# Altium PCB GpioPowerAddon.PcbDoc
Units mil, origin at the board's own origin, x right, y up, seen from the top; angles counter-clockwise.
Board outline 3300 x 1000 mil, 2 copper layers (Top Layer, Bottom Layer); 37 components, 30 nets, 156 pads, 7 vias.
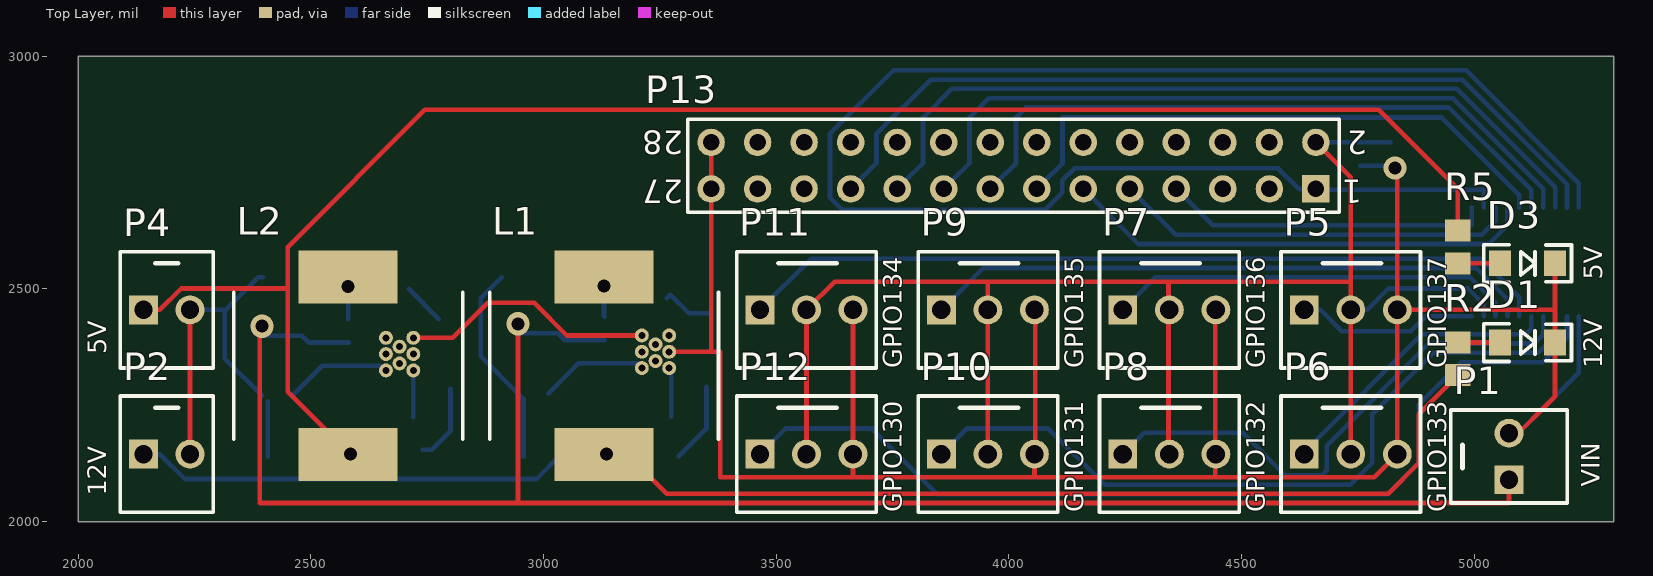
[diagram p0: Top Layer view]
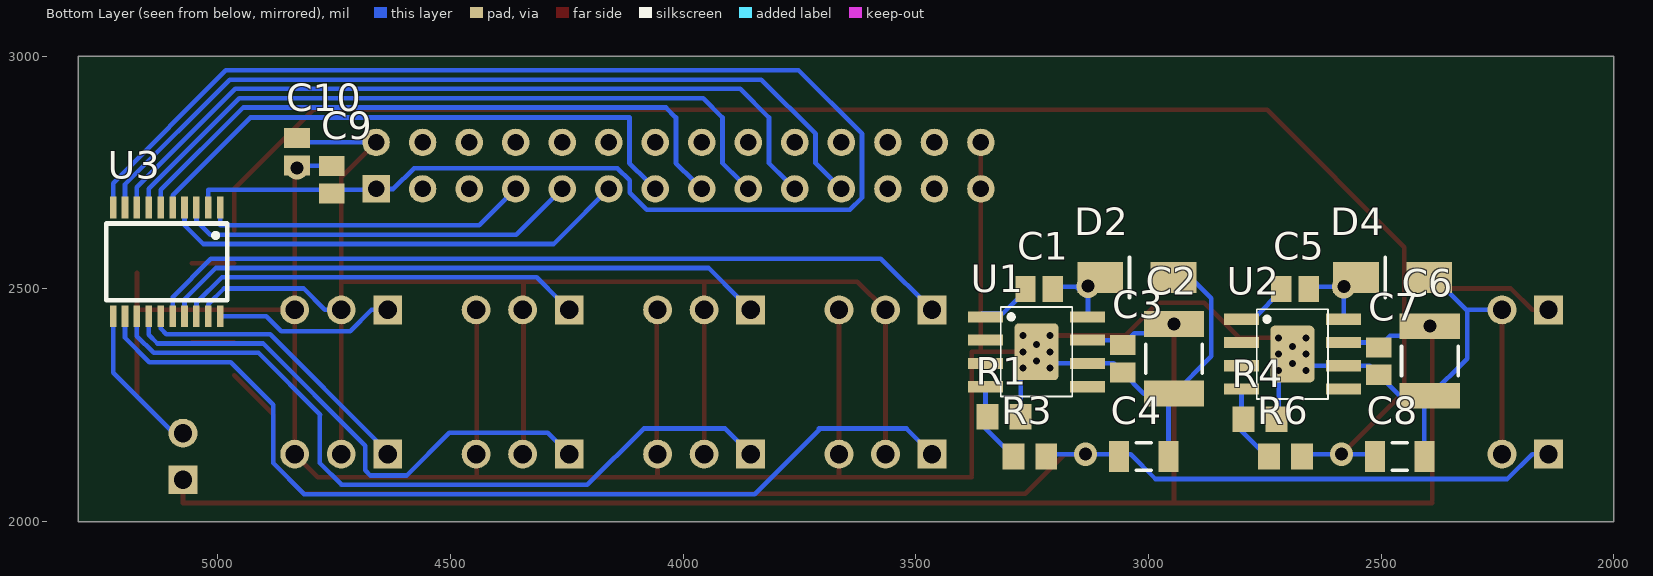
[diagram p1: Bottom Layer view, seen from below]

## Layer stack, top to bottom
Top Layer: signal copper 1.4
Dielectric: dielectric 12.6, FR-4, Dk 4.8
Bottom Layer: signal copper 1.4

## Board outline
2000,2000 5300,2000 5300,3000 2000,3000

## Design rules (kind name [scope] priority, off if disabled: settings)
Clearance [All] p1: gap=10
PolygonConnect [All] p1: connectstyle=Relief reliefconductorwidth=10 reliefentries=4 polygonreliefangle="90 Angle"
RoomDefinition VoltageLevelShifter [InComponentClass('VoltageLevelShifter')] p1: confinementstyle=ConfineIn formatcopy=TRUE lockcomponents=FALSE outline 1995,2000 5300,2000 5300,2980 1995,2980
RoomDefinition 12v5vVoltageRegulator [InComponentClass('12v5vVoltageRegulator')] p2: confinementstyle=ConfineIn formatcopy=TRUE lockcomponents=FALSE outline 1995,2000 5295,2000 5295,2990 1995,2990
RoutingVias [All] p1: holewidth=28 width=50 viastyle="Through Hole" minholewidth=28 minwidth=50 maxholewidth=28 maxwidth=50
SilkscreenOverComponentPads [All] p1: minsilkscreentomaskgap=10
SolderMaskExpansion [All] p1: expansion=4
Width [All] p1: maxlimit=10 minlimit=10 preferedwidth=10
27 further rules are at their usual default settings.

## Classes and differential pairs
component class VoltageLevelShifter: C9 C10 P5 P6 P7 P8 P9 P10 P11 P12 P13 U3
component class 12v5vVoltageRegulator: C1 C2 C3 C4 C5 C6 C7 C8 D1 D2 D3 D4 L1 L2 P1 P2 P4 R1 R2 R3 R4 R5 R6 U1 U2

## Components (designator, comment, footprint, x,y, rotation, side; value= is the part's Value field where it differs from the comment)
C1 "Cap Semi" CAPC2012L 3235,2500 r180 bottom
C2 "Cap Semi" CAPC4532L 2945,2350 r90 bottom
C3 "Cap Semi" CAPC2012L 3055,2350 r90 bottom
C4 "Cap Semi" CAPC3216L 3010,2140 r0 bottom
C5 "Cap Semi" CAPC2012L 2685,2500 r180 bottom
C6 "Cap Semi" CAPC4532L 2395,2345 r90 bottom
C7 "Cap Semi" CAPC2012L 2505,2345 r90 bottom
C8 "Cap Semi" CAPC3216L 2460,2140 r0 bottom
C9 "Cap Semi" CAPC2012L 4755,2735 r270 bottom
C10 "Cap Semi" CAPC2012L 4830,2795 r90 bottom
D1 "LED1" "1206 - LED" 5115,2385 r0 top
D2 "D Schottky" SMA 3025,2525 r180 bottom
D3 "LED1" "1206 - LED" 5115,2555 r0 top
D4 "D Schottky" SMA 2475,2525 r180 bottom
L1 "Inductor Iron" SRR1260 3130,2335 r270 top
L2 "Inductor Iron" SRR1260 2580,2335 r270 top
P1 "Header 2" "Connector Molex 2" 5075,2090 r90 top
P2 "Header 2" "Connector Molex 2" 2140,2145 r0 top
P4 "Header 2" "Connector Molex 2" 2140,2455 r0 top
P5 "Header 3" "Connector Molex 3" 4635,2455 r0 top
P6 "Header 3" "Connector Molex 3" 4635,2145 r0 top
P7 "Header 3" "Connector Molex 3" 4245,2455 r0 top
P8 "Header 3" "Connector Molex 3" 4245,2145 r0 top
P9 "Header 3" "Connector Molex 3" 3855,2455 r0 top
P10 "Header 3" "Connector Molex 3" 3855,2145 r0 top
P11 "Header 3" "Connector Molex 3" 3465,2455 r0 top
P12 "Header 3" "Connector Molex 3" 3465,2145 r0 top
P13 "Header 14X2" HDR2X14 4660,2715 r180 top
R1 "Res Semi" RESC2012N 3310,2225 r180 bottom
R2 "Res Semi" RESC2012N 4965,2350 r270 top
R3 "Res Semi" RESC2012N 3255,2140 r0 bottom
R4 "Res Semi" RESC2012N 2760,2220 r180 bottom
R5 "Res Semi" RESC2012N 4965,2590 r90 top
R6 "Res Semi" RESC2012N 2705,2140 r0 bottom
U1 "LM22676" LM22676 3350,2440 r270 bottom
U2 "LM22676" LM22676 2800,2435 r270 bottom
U3 "TXB0108" TSSOP20 4995,2675 r0 bottom

## Footprints (in the part's own frame and the unit in brackets; to place one, negate y for a bottom-side part, rotate by r counter-clockwise, add the part's x,y. Pads: shape width x height; smd on the part's side, far side on the other; paste and mask are expansions set on the pad)
"1206 - LED" [mm]
  rect 1.2x1.4 smd paste+0.2: A(-1.5,0) K(1.5,0)
  silkscreen extent -2.4,-1.04 2.4,1.02
CAPC2012L [mm] "Chip Capacitor, Body 2.0x1.3mm, (0805) IPC High Density"
  rect 1.1x1.4 smd: 1(-0.75,0) 2(0.75,0)
  body extent -1.1,-0.72 1.1,0.72, height 1.4
CAPC3216L [mm] "Chip Capacitor, Body 3.2x1.6mm, (1206) IPC High Density"
  rect 1.1x1.7 smd: 1(-1.35,0) 2(1.35,0)
  silkscreen extent -0.4,-0.75 0.4,0.75, body extent -1.7,-0.9 1.7,0.9, height 1.3
CAPC4532L [mm] "Chip Capacitor, Body 4.5x3.2mm, (1812) IPC High Density"
  rect 1.4x3.3 smd: 1(-1.9,0) 2(1.9,0)
  silkscreen extent -0.8,-1.55 0.8,1.55, body extent -2.4,-1.7 2.4,1.7, height 1.4
"Connector Molex 2" [mil]
  rect 62x62 hole 39.4: 1(0,0)
  round 62 hole 39.4: 2(100,0)
  silkscreen extent -50,-125 150,125
"Connector Molex 3" [mil]
  rect 62x62 hole 39.4: 1(0,0)
  round 62 hole 39.4: 2(100,0) 3(200,0)
  silkscreen extent -50,-125 250,125
HDR2X14 [mm] "Connector; Header; 14x2 Position"
  rect 1.5x1.5 hole 0.9: 1(0,0)
  round 1.5 hole 0.9: 2(0,-2.54) 3(2.54,0) 4(2.54,-2.54) 5(5.08,0) 6(5.08,-2.54) 7(7.62,0) 8(7.62,-2.54) 9(10.16,0) 10(10.16,-2.54) 11(12.7,0) 12(12.7,-2.54) 13(15.24,0) 14(15.24,-2.54) 15(17.78,0) 16(17.78,-2.54) 17(20.32,0) 18(20.32,-2.54) 19(22.86,0) 20(22.86,-2.54) 21(25.4,0) 22(25.4,-2.54) 23(27.94,0) 24(27.94,-2.54) 25(30.48,0) 26(30.48,-2.54) 27(33.02,0) 28(33.02,-2.54)
  silkscreen extent -1.27,-3.81 34.29,1.27
LM22676 [mil]
  rect 24.02x75.2 smd: 1(0,0) 2(50,0) 3(100,0) 4(150,0) 5(150,218.9) 6(100,218.9) 7(50,218.9) 8(0,218.9)
  round 30 hole 15: 9(40,80) 9(40,138.9) 9(59.06,109.45) 9(75,80) 9(75,138.9) 9(94.88,109.45) 9(110,80) 9(110,138.9)
  rrect20% 122.05x94.88 smd: 9(75,109.45)
  Top Overlay keep-out lines w3.94: 171.46,186.22 -21.46,186.22 -21.46,32.68 171.46,32.68 171.46,186.22
  silkscreen extent -21,33 171,186, body extent -21,33 171,186, height 56
RESC2012N [mm] "Chip Resistor, Body 2.0x1.2mm, (0805) IPC Medium Density"
  rect 1.2x1.4 smd: 1(-0.9,0) 2(0.9,0)
  body extent -1.07,-0.7 1.07,0.7, height 0.7
SMA [mm] "Diode, SMA Schottkey"
  rect 2.5x1.7 smd: A(2,0) K(-2,0)
  silkscreen extent -0.4,-1.1 -0.4,1.1, body extent -2.67,-1.52 2.67,1.52, height 2.3
SRR1260 [mm] "Power Inductor, Body 12.5x12.5mm"
  rect 2.9x5.4 smd: 1(-4.85,0) 2(4.85,0)
  silkscreen extent -4,-6.25 4,6.25, body extent -6.22,-6.22 6.22,6.22, height 6
TSSOP20 [mm]
  rect 0.36x1.19 smd: 1(0,0) 2(0.65,0) 3(1.3,0) 4(1.95,0) 5(2.6,0) 6(3.25,0) 7(3.9,0) 8(4.55,0) 9(5.2,0) 10(5.85,0) 11(0,5.94) 12(0.65,5.94) 13(1.3,5.94) 14(1.95,5.94) 15(2.6,5.94) 16(3.25,5.94) 17(3.9,5.94) 18(4.55,5.94) 19(5.2,5.94) 20(5.85,5.94)
  silkscreen extent -0.38,0.87 6.22,5.07

## Part data
C1 C2 C3 C4 C5 C6 C7 C8 C9 C10: "Capacitor (Semiconductor SIM Model)"
D1 D3: "Typical RED GaAs LED"
D2 D4: "Schottky Diode"
L1 L2: "Magnetic-Core Inductor"
P1 P2 P4: "Header, 2-Pin"
P5 P6 P7 P8 P9 P10 P11 P12: "Header, 3-Pin"
P13: "Header, 14-Pin, Dual row"
R1 R2 R3 R4 R5 R6: "Semiconductor Resistor"
U1 U2: "3A SIMPLE SWITCHER"
U3: "Voltage Level Shifter"

## Via types
v1: diameter 50, hole 28, Top Layer to Bottom Layer, 7 vias

## Nets (pads, with @x,y where several pads share a name; then routed paths per layer and width w, separated by ;. In a path a pad name is that pad's centre, name@x,y a point inside that pad or via, vN(x,y) a via of type N, cw(c..) or ccw(c..) an arc to the next point about the centre after c; other vN are vias at no path point)
+5: C8.2 L2.2 P4.1 R5.2 R6.1 | length 3773.4
  Top Layer w10: P4.1 2174.95,2455 2220.95,2501 2446,2501 ; L2.2 L2.2@2590,2144.06 ; L2.2@2580,2149.06 2450,2279.06 2450,2590 2745,2885 4795,2885 4965,2715 R5.2
  Bottom Layer w10: C8.2@2518.15,2145 v1(2585,2145) R6.1@2664.57,2145
+12: C4.2 L1.2 P2.1 R2.2 R3.1 | length 3155.4
  Top Layer w10: L1.2 3180.94,2144.06 3265,2060 4815.05,2060 4881,2125.95 4881,2230.57 R2.2
  Bottom Layer w10: P2.1 2174.95,2145 2228.41,2091.54 2984.72,2091.54 3038.18,2145 v1(3135,2145) R3.1@3214.57,2145
+16: C2.2 C3.2 C6.2 C7.2 P1.1 U1.7 U2.7 | length 3873.6
  Top Layer w10: 2390,2040 5075,2040 P1.1 ; 2390,2045 2390,2405 v1@2400,2415 ; 2945,2045 v1(2945,2425)
  Bottom Layer w10: C6.2@2395,2399.8 2480.67,2399.8 2495.47,2385 U2.7 ; C2.2@2945,2404.8 3030.67,2404.8 3045.47,2390 U1.7
  other v1: 2395,2420
DC_5V: C10.2 P5.2 P6.2 P7.2 P8.2 P9.2 P10.2 P11.2 P12.2 P13.2 U3.12 | length 3450.6
  Top Layer w10: P12.2 P11.2 3625.47,2515.47 3955,2515.47 ; P10.2 P9.2 3955,2515.47 ; P8.2@4343.33,2145 4343.33,2513.81 ; P13.2 4735,2740 4735,2515.47 ; P6.2 P5.2 4735,2515.47 ; 3955,2515.47 4735,2515.47
  Bottom Layer w10: P13.2 C10.2@4820.47,2815 ; P5.2 4769.95,2455 4815.95,2501 4986.87,2501 5020.59,2467.28 U3.12
GND: C2.1 C3.1 C4.1 C6.1 C7.1 C8.1 C9.1 C10.1 D1.K D2.A D3.K D4.A P1.2 P2.2 P4.2 P5.3 P6.3 P7.3 P8.3 P9.3 P10.3 P11.3 P12.3 P13.27 P13.28 R1.2 R4.2 U1.6 U1.9 U2.6 U2.9 U3.20 | length 7592.4
  Top Layer w10: P2.2 P4.2 ; U2.9@2720,2395 2805,2395 2880,2470 2980,2470 3050,2400 U1.9@3211.1,2400 ; U1.9@3270,2365 3360,2365 ; P13.28 P13.27 3360,2365 ; 3380,2095 3665,2095 ; 3380,2100 3380,2365 3360,2365 ; P11.3 P12.3 3665,2095 ; P10.3 4055,2095 ; P10.3@4056.67,2143.33 P9.3@4056.67,2455 ; 4443.33,2096.67 P7.3@4443.33,2455 ; v1(4830,2760) 4835,2765 P5.3 ; P1.2@5075,2170 5174.06,2269.06 D1.K 5174.06,2455 ; D3.K@5174.06,2535 5174.06,2455 ; 3665,2095 4055,2095 ; 4055,2095 4785,2095 P6.3 P5.3 ; P5.3 5174.06,2455
  Bottom Layer w10: P4.2 2313.54,2455 ; C6.1 2315,2350.2 2315,2453.54 2386.46,2525 D4.A ; C8.1 C6.1@2406.85,2258.35 ; C6.1@2459.72,2270.2 C7.1 2524.53,2335 U2.6 U2.9@2651.1,2335 ; R4.2@2720,2224.57 U2.9@2720,2325 ; D2.A@2910,2525 2865,2480 2865,2355.2 C2.1 2956.85,2263.35 C4.1 ; C2.1@3009.72,2275.2 C3.1 3074.53,2340 U1.6 U1.9@3201.1,2340 ; R1.2 U1.9@3274.57,2325.43 ; C9.1 C10.1@4830,2764.53 ; P1.2@5095,2190 5225.31,2320.31 U3.20
NetC1_1: C1.1 U1.1 | length 112.8
  Bottom Layer w10: C1.1@3264.53,2480 3272.26,2487.74 3312.5,2447.5 U1.1@3357.5,2447.5
NetC1_2: C1.2 D2.K L1.1 U1.8 | length 187.3
  Bottom Layer w10: U1.8 3130,2441.1 v1(3130,2505.94) 3136.49,2499.46 3136.49,2486.49 3155,2505 3200.47,2505 C1.2 C1.2@3205.47,2480
NetC5_1: C5.1 U2.1 | length 91.9
  Bottom Layer w10: C5.1@2710,2500 U2.1@2775,2435
NetC5_2: C5.2 D4.K L2.1 U2.8 | length 196
  Bottom Layer w10: U2.8@2580,2435 v1(2580,2505) ; C5.2@2655.47,2505 v1(2580,2505) ; v1(2580,2505) 2578.74,2480 2580,2481.26 v1(2580,2505)
NetD1_A: D1.A R2.1 | length 90.5
  Top Layer w10: R2.1@4965.43,2385 D1.A
NetD3_A: D3.A R5.1 | length 90.5
  Top Layer w10: R5.1@4965.43,2555 D3.A
NetP5_1: P5.1 U3.11 | length 392.4
  Bottom Layer w10: P5.1 4669.95,2455 4715.95,2409 4864,2409 4896.14,2441.14 U3.11
NetP6_1: P6.1 U3.16 | length 610.6
  Bottom Layer w10: P6.1@4640,2170 4655,2170 4887.72,2402.72 5110.66,2402.72 5122.95,2415.01 U3.16
NetP7_1: P7.1 U3.13 | length 854.7
  Bottom Layer w10: P7.1@4264.17,2474.17 4315,2525 4991.15,2525 5046.18,2469.97 U3.13
NetP8_1: P8.1 U3.17 | length 1129.7
  Bottom Layer w10: P8.1@4264.17,2164.17 4291,2191 4502.39,2191 4594.39,2099 4672.21,2099 4683.28,2110.07 4683.28,2163.28 4902.72,2382.72 5129.8,2382.72 5148.54,2401.46 U3.17
NetP9_1: P9.1 U3.14 | length 1285.8
  Bottom Layer w10: P9.1@3878.33,2478.33 3945,2545 5005,2545 5071.77,2478.23 U3.14
NetP10_1: P10.1 U3.18 | length 1595.7
  Bottom Layer w10: P10.1@3878.33,2168.33 3910,2200 4085,2200 4206,2079 4735,2079 ; 4734.05,2079 4781,2125.95 4781,2228.72 ; 4779.86,2229.86 4912.72,2362.72 5138.09,2362.72 5174.13,2398.76 U3.18
NetP11_1: P11.1 U3.15 | length 1753.5
  Bottom Layer w10: P11.1 3575,2565 5015,2565 5097.36,2482.64 U3.15
NetP12_1: P12.1 U3.19 | length 2074.2
  Bottom Layer w10: P12.1 3520,2200 3708.45,2200 ; 3707.5,2197.5 3846,2059 4815,2059 ; 4814.05,2059 4881,2125.95 4881,2250.97 4972.06,2342.03 ; 4972.72,2342.72 5147.16,2342.72 5199.72,2395.28 U3.19
NetP13_7: P13.7 U3.1 | length 730.7
  Bottom Layer w10: P13.7@4342.5,2732.5 P13.7 4438.43,2636.57 4995,2636.57 U3.1
NetP13_9: P13.9 U3.3 | length 892.8
  Bottom Layer w10: P13.9@4242.5,2732.5 4358.43,2616.57 5016.58,2616.57 5046.18,2646.17 U3.3
NetP13_11: P13.11 U3.4 | length 1040.5
  Bottom Layer w10: P13.11@4142.5,2732.5 4278.43,2596.57 5031.57,2596.57 5071.77,2636.77 U3.4
NetP13_13: P13.13 U3.5 | length 1229
  Bottom Layer w10: P13.13@4077.5,2732.5 4115.47,2770.47 4115.47,2868.44 4930.05,2868.44 5097.36,2701.14 U3.5
NetP13_15: P13.15 U3.6 | length 1379.4
  Bottom Layer w10: P13.15@3977.5,2732.5 4015.47,2770.47 4015.47,2868.44 4037.03,2890 4945.9,2890 5122.95,2712.95 U3.6
NetP13_17: P13.17 U3.7 | length 1523.1
  Bottom Layer w10: P13.17@3877.5,2732.5 3915.47,2770.47 3915.47,2868.44 3957.03,2910 4954.19,2910 5148.54,2715.64 U3.7
NetP13_19: P13.19 U3.8 | length 1666.8
  Bottom Layer w10: P13.19@3777.5,2732.5 3815.47,2770.47 3815.47,2868.44 3877.03,2930 4962.47,2930 5174.13,2718.34 U3.8
NetP13_21: P13.21 U3.9 | length 1817
  Bottom Layer w10: P13.21 3715.47,2770.47 3715.47,2833.44 3832.03,2950 4974.45,2950 5199.72,2724.72 U3.9
NetR1_1: R1.1 R3.2 U1.4 | length 174.7
  Bottom Layer w10: R3.2 3350,2199.57 U1.4
NetR4_1: R4.1 R6.2 U2.4 | length 166.3
  Bottom Layer w10: R6.2@2740.43,2154.69 2759.69,2154.69 2800,2195 U2.4
VIO_1V8: C9.2 P13.1 U3.2 U3.10 | length 3479.7
  Bottom Layer w10: P13.1 4622.97,2715 4578.44,2759.53 4141.24,2759.53 4115,2733.28 4115,2707.03 4078.44,2670.47 3641.56,2670.47 3615.47,2696.56 3615.47,2833.44 3752.03,2970 4982.73,2970 5225.31,2727.42 U3.10 ; P13.1@4661.57,2713.43 5020.59,2713.43 U3.2
pads on no net: P13.3 P13.4 P13.5 P13.6 P13.8 P13.10 P13.12 P13.14 P13.16 P13.18 P13.20 P13.22 P13.23 P13.24 P13.25 P13.26 U1.2 U1.3 U1.5 U2.2 U2.3 U2.5

## Silkscreen, mask and mechanical layers (free items; w line width, h text height)
Top Overlay:
  text "5V" at 5275,2520 h40 r90
  text "5V" at 2060,2360 h40 r90
  text "GPIO134" at 3770,2330 h40 r90
  text "GPIO135" at 4160,2330 h40 r90
  text "GPIO136" at 4550,2330 h40 r90
  text "GPIO137" at 4940,2330 h40 r90
  text "12V" at 5275,2330 h40 r90
  text "VIN" at 5270,2075 h40 r90
  text "12V" at 2060,2055 h40 r90
  text "GPIO130" at 3770,2020 h40 r90
  text "GPIO131" at 4160,2020 h40 r90
  text "GPIO132" at 4550,2020 h40 r90
  text "GPIO133" at 4940,2020 h40 r90
Drill Drawing:
  the board outline again, w10

## Text inside footprints (layer, text, board x,y; h text height)
P13: Top Overlay "1" at 4760,2735 h50 r180; Top Overlay "27" at 3300,2735 h50 r180; Top Overlay "28" at 3300,2840 h50 r180; Top Overlay "2" at 4770,2840 h50 r180